# EAGLE board esp32buscam_02 (EAGLE 9.6.2)

Size 22.01 x 18.93 mm. Coordinates in mm from the lower left corner, seen from the top.
Outline: 18.62,18.93 arc-272 3.38,18.93 18.62,18.93
Copper layers (1*16): Top 0.035mm / dielectric 0.2mm / Bottom 0.035mm
Design rules "jlcpcb-2-layer": minimum track width 3.5mil, minimum drill 0.2mm, track to track 3.5mil, track to pad 5mil, pad to pad 5mil, via to via 5mil, smd to smd 0mil, copper to edge 0.1mm, drill to drill 5mil, minimum pad ring 4mil, minimum via ring 4mil, stop-mask expansion 3mil, vias tented up to drill 100mil, thermal gap 10mil
Net classes: 0 default: width 0.089 mm, drill 0.2 mm; 1 gnd: width 0.254 mm, drill 0.2 mm; 2 power: width 0.254 mm, drill 0.2 mm

## Footprints (pad centres in the part's own frame; a part is rotated, then mirrored left to right if it is on the bottom)
SJ = smd 1.168 x 1.6: 1 -0.762,0; 2 0.762,0
MICROMATCH-6SMD = smd 1.27 x 3.81: 1 3.175,-2.54; 2 1.905,2.54; 3 0.635,-2.54; 4 -0.635,2.54; 5 -1.905,-2.54; 6 -3.175,2.54
C0603 = smd 1.1 x 1: 1 -0.85,0; 2 0.85,0
C0805 = smd 1.3 x 1.5: 1 -0.95,0; 2 0.95,0
B/3528-21R = smd 1.95 x 2.5: + 1.525,0; - -1.525,0
MINIMELF = smd 1.4 x 1.8: A 1.7,0; C -1.7,0
SOT89 = smd 0.58 x 1.2: 1 -1.5,-1.8; 2 0,-1.8; 3 1.5,-1.8 | smd 2 x 2: 4 0,1.3
68712414522 = smd 0.3 x 1.2: 1 -5.75,0.6; 2 -5.25,0.6; 3 -4.75,0.6; 4 -4.25,0.6; 5 -3.75,0.6; 6 -3.25,0.6; 7 -2.75,0.6; 8 -2.25,0.6; 9 -1.75,0.6; 10 -1.25,0.6; 11 -0.75,0.6; 12 -0.25,0.6; 13 0.25,0.6; 14 0.75,0.6; 15 1.25,0.6; 16 1.75,0.6; 17 2.25,0.6; 18 2.75,0.6; 19 3.25,0.6; 20 3.75,0.6; 21 4.25,0.6; 22 4.75,0.6; 23 5.25,0.6; 24 5.75,0.6 | smd 2.7 x 3: Z1 -7.68,-1.38; Z2 7.68,-1.38
LED5MM = drill 0.813 octagon: A -1.27,0; K 1.27,0
1,6/0,9 = drill 0.914 pad 1.6 octagon: 1 0,0
SOT23-3 = smd 0.8 x 0.9: 1 -0.95,-1; 2 0.95,-1; 3 0,1.1
R0603 = smd 1 x 1.1: 1 -0.85,0; 2 0.85,0
R0402 = smd 0.6 x 0.7: 1 -0.5,0; 2 0.5,0
QFN60_ESP32-S2-MINI-1_EXP = smd 0.813 x 0.406: 1 -7,3.645; 2 -7,2.795; 3 -7,1.945; 4 -7,1.095; 5 -7,0.245; 6 -7,-0.605; 7 -7,-1.455; 8 -7,-2.305; 9 -7,-3.155; 10 -7,-4.005; 11 -7,-4.855; 12 -7,-5.705; 13 -7,-6.555; 14 -7,-7.405; 15 -7,-8.255; 31 7,-8.255; 32 7,-7.405; 33 7,-6.555; 34 7,-5.705; 35 7,-4.855; 36 7,-4.005; 37 7,-3.155; 38 7,-2.305; 39 7,-1.455; 40 7,-0.605; 41 7,0.245; 42 7,1.095; 43 7,1.945; 44 7,2.795; 45 7,3.645 | smd 0.406 x 0.813: 16 -5.95,-9.305; 17 -5.1,-9.305; 18 -4.25,-9.305; 19 -3.4,-9.305; 20 -2.55,-9.305; 21 -1.7,-9.305; 22 -0.85,-9.305; 23 0,-9.305; 24 0.85,-9.305; 25 1.7,-9.305; 26 2.55,-9.305; 27 3.4,-9.305; 28 4.25,-9.305; 29 5.1,-9.305; 30 5.95,-9.305; 46 5.95,4.695; 47 5.1,4.695; 48 4.25,4.695; 49 3.4,4.695; 50 2.55,4.695; 51 1.7,4.695; 52 0.85,4.695; 53 0,4.695; 54 -0.85,4.695; 55 -1.7,4.695; 56 -2.55,4.695; 57 -3.4,4.695; 58 -4.25,4.695; 59 -5.1,4.695; 60 -5.95,4.695 | smd 1.194 x 1.194: 61 0,-2.305; 66 -1.65,-0.655; 67 0,-0.655; 68 1.65,-0.655; 69 -1.65,-2.305; 70 1.65,-2.305; 71 -1.65,-3.955; 72 0,-3.955; 73 1.65,-3.955 | smd 0.813 x 0.813: 62 -7,4.695; 63 -7,-9.305; 64 7,-9.305; 65 7,4.695
CONN_10118192-0002LF_AMP = smd 0.406 x 1.346: 1 -1.3,2.204; 2 -0.65,2.204; 3 0,2.204; 4 0.65,2.204; 5 1.3,2.204 | smd 1.6 x 2.108: 6 -3.1,2.079; 7 3.1,2.079 | smd 1.905 x 1.803: 8 -3.8,-0.471; 9 3.8,-0.471 | smd 1.905 x 1.905: 10 -1.2,-0.471; 11 1.2,-0.471

## Placement (x,y rotation side)
BOOT  [SJ]  33.74,9.27 0 bottom  (outside the outline)
BUS  BUS  [MICROMATCH-6SMD]  49.36,19.56 270 top  (outside the outline)
C2  [C0603]  23.58,10.29 270 top
C3  0.1  [C0805]  24.34,14.35 90 top
C8  0.1  [C0805]  23.96,2.8 0 top
C10  100uF/6V  [B/3528-21R]  27.89,6.99 0 top  (outside the outline)
C17  [C0603]  2.75,22.74 90 bottom
C18  [C0603]  12.27,22.74 270 bottom
C19  [C0603]  0.84,20.2 270 bottom
C21  [C0603]  26.37,10.29 180 top  (outside the outline)
C22  [C0603]  24.47,21.72 0 top
D1  [MINIMELF]  32.34,15.37 180 top  (outside the outline)
D2  [MINIMELF]  31.58,11.94 180 top  (outside the outline)
D3  [MINIMELF]  26.24,14.35 90 top  (outside the outline)
IC1  MCP1703SOT-89  [SOT89]  36.02,19.31 270 bottom  (outside the outline)
IC2  MCP1703SOT-89  [SOT89]  30.18,21.21 180 top  (outside the outline)
IC3  MCP1703SOT-89  [SOT89]  39.71,21.21 180 top  (outside the outline)
K1  68712414522  [68712414522]  11,13.85 180 top
LED1  [LED5MM]  40.85,15.12 90 bottom  (outside the outline)
LED2  [LED5MM]  39.58,6.23 90 bottom  (outside the outline)
PAD5  [1,6/0,9]  26.24,15.75 0 top  (outside the outline)
PAD6  [1,6/0,9]  24.34,15.75 0 top
Q2  IRLML2244  [SOT23-3]  26.88,24.01 0 bottom  (outside the outline)
Q4  IRLML2244  [SOT23-3]  22.69,24.01 0 bottom  (outside the outline)
R1  [R0603]  22.69,5.97 180 top
R2  [R0402]  4.91,20.45 0 top
R4  [R0402]  19.26,21.34 0 bottom
R6  [R0603]  7.19,23.37 90 bottom  (outside the outline)
R7  [R0603]  5.29,23.37 90 bottom  (outside the outline)
R20  [R0603]  9.73,23.37 270 bottom  (outside the outline)
SJ3  [SJ]  14.56,22.99 90 bottom  (outside the outline)
SJ4  [SJ]  29.42,3.18 0 bottom  (outside the outline)
SJ5  [SJ]  16.85,22.99 270 bottom  (outside the outline)
U1  ESP32-S2-MINI-1  [QFN60_ESP32-S2-MINI-1_EXP]  11,8.77 180 bottom
USB  10118192-0002LF  [CONN_10118192-0002LF_AMP]  48.6,8.89 0 top  (outside the outline)

## Library data of the parts
BOOT SJ3-SJ5 = jumper
BUS = con-amp-micromatch
C2 C17-C19 C21 C22 = rcl; SPICEPREFIX: C
C3 C8 C10 = rcl
D1-D3 = diode
IC1-IC3 = bytewerk-vreg
K1 = FPC_Connectors_Flat_Flexible_Cable_rev15c
LED1 LED2 = led
PAD5 PAD6 = wirepad
Q2 Q4 = User-Submitted; PROD_ID: TRANS-11153
R1 R2 R4 R6 R7 R20 = rcl; SPICEPREFIX: R
U1 = esp32s2mini; BUILT_BY: EMA_Kyle; COPYRIGHT: Copyright (C) 2018 Accelerated Designs. All rights reserved; DATASHEET: https://www.espressif.com/sites/default/files/documentation/esp32-s2-mini-1_esp32-s2-mini-1u_datasheet_en.pdf; MANUFACTURER_PART_NUMBER: ESP32-S2-MINI-1; SOURCELIBRARY: Add_to_database_2020-11-03; VENDOR: Espressif Systems
USB = esp32s2mini; BUILT_BY: EMA_Cory; COPYRIGHT: Copyright (C) 2018 Accelerated Designs. All rights reserved; DATASHEET: https://www.amphenol-icc.com/media/wysiwyg/files/drawing/10118192.pdf; MANUFACTURER_PART_NUMBER: 10118192-0002LF; SOURCELIBRARY: Amphenol_ICC_2020-05-19; VENDOR: Amphenol

## Nets
BUS_MISO_INT: BUS.1 U1.41
BUS_MOSI_SDA: BUS.4 U1.13
BUS_RESET: BUS.5 D1.C SJ4.2
BUS_SCK_SCL: BUS.3 U1.34
CAM_D0: K1.6 U1.17
CAM_D1: K1.4 U1.8
CAM_D2: K1.3 U1.29
CAM_D3: K1.5 U1.33
CAM_D4: K1.7 U1.16
CAM_D5: K1.9 U1.26
CAM_D6: K1.11 U1.25
CAM_D7: K1.13 U1.22
CAM_HSYNC: K1.16 U1.7
CAM_ON: Q4.1 U1.32
CAM_PCLK: C18.2 K1.8 U1.28
CAM_PWRDN: K1.17 U1.14
CAM_RESET: K1.19 U1.15
CAM_SCL: K1.20 R6.1 U1.11
CAM_SDA: K1.22 R7.1 U1.12
CAM_U1.2: C22.1 IC3.3 K1.15
CAM_U2.8: C21.2 IC2.3 K1.21
CAM_VSYNC: K1.18 U1.6
CAM_XCLK: K1.12 R20.2 U1.5
ESP_EN: C2.2 D1.A R1.1 U1.45
ESP_IO0: BOOT.2 U1.4
ESP_RXD: U1.39
ESP_TCK: U1.35
ESP_TDI: U1.37
ESP_TDO: U1.36
ESP_TMS: U1.38
ESP_TXD: U1.40
GND [gnd]: BOOT.1 BUS.6 C2.1 C3.2 C8.2 C10.- C17.1 C18.1 C19.2 C21.1 C22.2 IC1.1 IC2.1 IC3.1 K1.10 K1.23 LED1.K LED2.K PAD6.1 U1.1 U1.2 U1.30 U1.42 U1.43 U1.46 U1.47 U1.48 U1.49 U1.50 U1.51 U1.52 U1.53 U1.54 U1.55 U1.56 U1.57 U1.58 U1.59 U1.60 U1.61 U1.62 U1.63 U1.64 U1.65 U1.66 U1.67 U1.68 U1.69 U1.70 U1.71 U1.72 U1.73 USB.5
IRLED_ON: Q2.1 U1.31
LED_ON: U1.9
N$1: LED1.A R4.1
N$2: SJ4.1 U1.44
N$3: LED2.A R2.1
N$8: Q2.3 R2.2 R4.2 SJ5.1
SD_CLK: U1.19
SD_CS0: U1.21
SD_MISO: U1.18
SD_MOSI: U1.20
SD_ON: U1.10
USB_DM: U1.23 USB.2
USB_DP: U1.24 USB.3
USB_VBUS [power]: D2.A USB.1
V [power]: C3.1 D2.C D3.C IC1.2 IC1.4
VCC [power]: BUS.2 C8.1 C10.+ IC1.3 Q2.2 Q4.2 R1.2 SJ3.1 SJ5.2 U1.3
VCC_CAM [power]: C17.2 C19.1 IC2.2 IC2.4 IC3.2 IC3.4 K1.14 Q4.3 R6.2 R7.2 R20.1 SJ3.2
VEXT: D3.A PAD5.1

## Tracks (layer width: path | path; a pad name or v marks a point on that pad's centre or on a via)
BUS_MISO_INT  (1 unrouted)
BUS_MOSI_SDA  (1 unrouted)
BUS_RESET  (2 unrouted)
BUS_SCK_SCL  (1 unrouted)
CAM_D0  (1 unrouted)
CAM_D1  (1 unrouted)
CAM_D2  (1 unrouted)
CAM_D3  (1 unrouted)
CAM_D4  (1 unrouted)
CAM_D5  (1 unrouted)
CAM_D6  (1 unrouted)
CAM_D7  (1 unrouted)
CAM_HSYNC  (1 unrouted)
CAM_ON  (1 unrouted)
CAM_PCLK  (2 unrouted)
CAM_PWRDN  (1 unrouted)
CAM_RESET  (1 unrouted)
CAM_SCL  (2 unrouted)
CAM_SDA  (2 unrouted)
CAM_U1.2  (2 unrouted)
CAM_U2.8  (2 unrouted)
CAM_VSYNC  (1 unrouted)
CAM_XCLK  (2 unrouted)
ESP_EN  (3 unrouted)
ESP_IO0  (1 unrouted)
GND  (52 unrouted)
IRLED_ON  (1 unrouted)
N$1  (1 unrouted)
N$2  (1 unrouted)
N$3  (1 unrouted)
N$8  (3 unrouted)
USB_DM  (1 unrouted)
USB_DP  (1 unrouted)
USB_VBUS  (1 unrouted)
V  (4 unrouted)
VCC  (9 unrouted)
VCC_CAM  (11 unrouted)
VEXT  (1 unrouted)